# Altium PCB QUTMS-TSAL-V00-B00.PcbDoc
Units mil, origin at the board's own origin, x right, y up, seen from the top; angles counter-clockwise.
Board outline 2050 x 2050 mil, 2 copper layers (Top Layer, Bottom Layer); 37 components, 15 nets, 145 pads, 0 vias.
Unrouted connection lines stored in the file: 9.
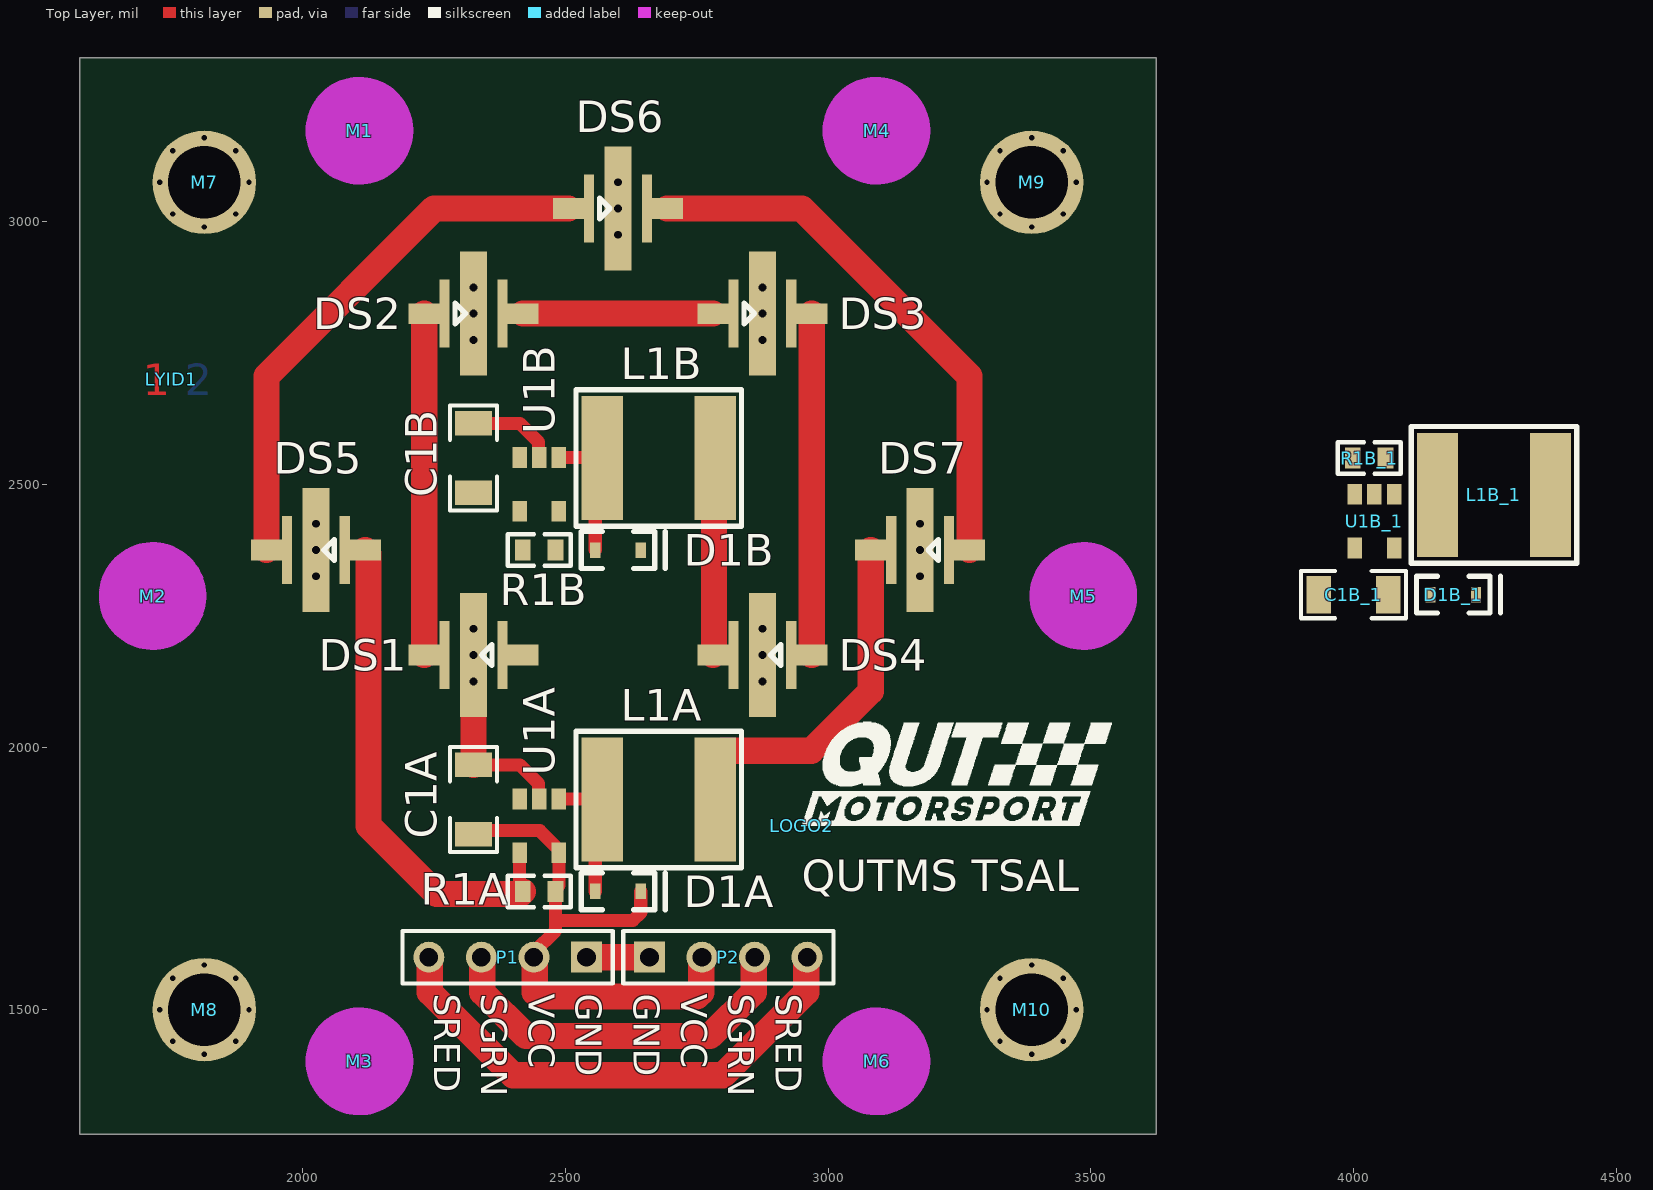
[diagram p0: Top Layer view]
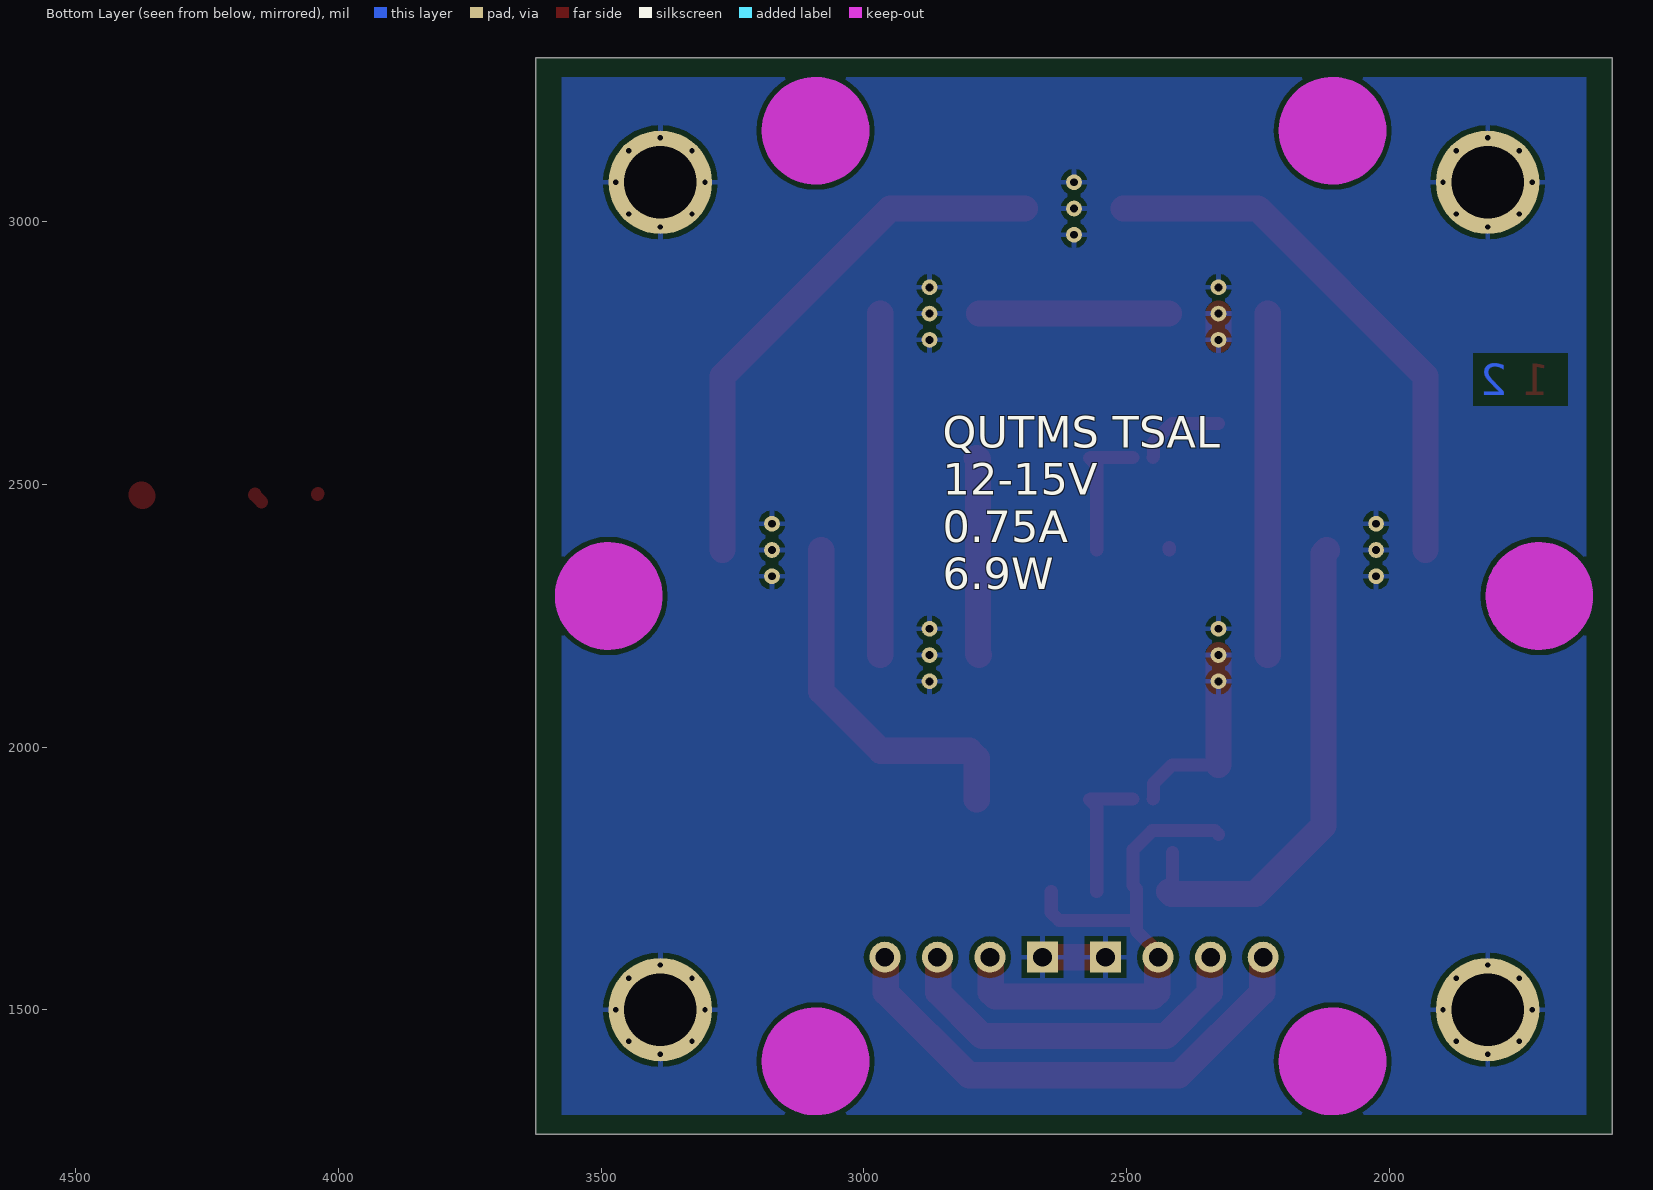
[diagram p1: Bottom Layer view, seen from below]

## Layer stack, top to bottom
Top Solder: solder mask 0.4, Solder Resist, Dk 3.5
Top Layer: signal copper 1.4
Dielectric 1: dielectric 12.6, FR-4, Dk 4.8
Bottom Layer: signal copper 1.4
Bottom Solder: solder mask 0.4, Solder Resist, Dk 3.5

## Board outline
1575,1262.5 3625,1262.5 3625,3312.5 1575,3312.5

## Design rules (kind name [scope] priority, off if disabled: settings)
Clearance [All] p1: gap=10 ignorepadtopadclearanceinfootprint=FALSE except(0: Arc-Hole Track-Hole SMDPad-Hole THPad-Hole Via-Hole Fill-Hole Poly-Hole Region-Hole Text-Hole; 6: SMDPad-SMDPad)
PolygonConnect [All] p1: connectstyle=Relief reliefconductorwidth=10 reliefentries=4 polygonreliefangle="90 Angle" airgapwidth=10
RoutingVias [All] p1: holewidth=28 width=50 viastyle="Through Hole" minholewidth=28 minwidth=50 maxholewidth=28 maxwidth=50
SolderMaskExpansion [All] p1: expansion=4 istentingtop=FALSE
Width [All] p1: maxlimit=50 minlimit=25 preferedwidth=25 minimp=50.000000 maximp=50.000000 favimp=50.000000
30 further rules are at their usual default settings.

## Classes and differential pairs
component class "RED LED ARRAY": DS1 DS2 DS3 DS4
component class "GREEN LED ARRAY": DS5 DS6 DS7
channel class QUTMS-TSAL-V00-S01: "GREEN LED DRIVER" "RED LED DRIVER" "RED LED DRIVERA" "RED LED DRIVERB"
component class QUTMS-TSAL-V00-S00: LOGO1 LOGO2 LYID1 M1 M2 M3 M4 M5 M6 M7 M8 M9 M10 P1
component class "RED LED DRIVER": C1B D1B L1B R1B U1B
component class "GREEN LED DRIVER": C1A D1A L1A R1A U1A

## Components (designator, comment, footprint, x,y, rotation, side; value= is the part's Value field where it differs from the comment)
C1A "10uF 25V X7R 1206" Cap_Ceramic_1206 2325,1900 r270 top (schematic designator C1)
C1B "10uF 25V X7R 1206" Cap_Ceramic_1206 2325,2550 r270 top (schematic designator C1)
C1B_1 "10uF 25V X7R 1206" Cap_Ceramic_1206 4000,2290 r0 top (schematic designator C1)
D1A "PMEG2005EJ" SOD-323F 2600,1725 r0 top (schematic designator D1)
D1B "PMEG2005EJ" SOD-323F 2600,2375 r0 top (schematic designator D1)
D1B_1 "PMEG2005EJ" SOD-323F 4190,2290 r0 top (schematic designator D1)
DS1 "Cree XLamp XP-E2 Red" "Cree XLamp XP-E2" 2325,2175 r180 top
DS2 "Cree XLamp XP-E2 Red" "Cree XLamp XP-E2" 2325,2825 r0 top
DS3 "Cree XLamp XP-E2 Red" "Cree XLamp XP-E2" 2875,2825 r0 top
DS4 "Cree XLamp XP-E2 Red" "Cree XLamp XP-E2" 2875,2175 r180 top
DS5 "Cree XLamp XP-E2 Green" "Cree XLamp XP-E2" 2025,2375 r180 top
DS6 "Cree XLamp XP-E2 Green" "Cree XLamp XP-E2" 2600,3025 r0 top
DS7 "Cree XLamp XP-E2 Green" "Cree XLamp XP-E2" 3175,2375 r180 top
L1A "SRN6045" "Bourns Inductor 6x6x4.5mm" 2675,1900 r0 top (schematic designator L1)
L1B "SRN6045" "Bourns Inductor 6x6x4.5mm" 2675,2550 r0 top (schematic designator L1)
L1B_1 "SRN6045" "Bourns Inductor 6x6x4.5mm" 4265,2480 r0 top (schematic designator L1)
LOGO1 "LBL Hot Surface M" "LBL HOT MEDIUM" 1140,1810 r0 top
LOGO2 "15mm Wide QUTMS Logo" "QUTMS LOGO 15MM" 2950,1850 r0 top
LYID1 "2 Layer Identification PCB Marker" "LAYER IDENT 2" 1750,2700 r0 top
M1 "Hole M3 Loose Unplated" "M3.5 UNPLATED" 2107.87,3173.23 r0 top
M2 "Hole M3 Loose Unplated" "M3.5 UNPLATED" 1714.17,2287.4 r0 top
M3 "Hole M3 Loose Unplated" "M3.5 UNPLATED" 2107.87,1401.57 r0 top
M4 "Hole M3 Loose Unplated" "M3.5 UNPLATED" 3092.13,3173.23 r0 top
M5 "Hole M3 Loose Unplated" "M3.5 UNPLATED" 3485.83,2287.4 r0 top
M6 "Hole M3 Loose Unplated" "M3.5 UNPLATED" 3092.13,1401.57 r0 top
M7 "Hole M3 Loose Plated" "M3.5 PLATED" 1812.6,3074.8 r0 top
M8 "Hole M3 Loose Plated" "M3.5 PLATED" 1812.6,1500 r0 top
M9 "Hole M3 Loose Plated" "M3.5 PLATED" 3387.4,3074.8 r0 top
M10 "Hole M3 Loose Plated" "M3.5 PLATED" 3387.4,1500 r0 top
P1 "Header 4" HDR1X4 2540,1600 r180 top
P2 "Header 4" HDR1X4 2660,1600 r0 top
R1A "0R27 1% 0603" Res_ThinFilm_0603 2450,1725 r180 top (schematic designator R1)
R1B "0R27 1% 0603" Res_ThinFilm_0603 2450,2375 r180 top (schematic designator R1)
R1B_1 "0R27 1% 0603" Res_ThinFilm_0603 4030,2550 r180 top (schematic designator R1)
U1A "AL8860WT-7" TSOT-25 2450,1850 r180 top (schematic designator U1)
U1B "AL8860WT-7" TSOT-25 2450,2500 r180 top (schematic designator U1)
U1B_1 "AL8860WT-7" TSOT-25 4040,2430 r180 top (schematic designator U1)

## Footprints (in the part's own frame and the unit in brackets; to place one, negate y for a bottom-side part, rotate by r counter-clockwise, add the part's x,y. Pads: shape width x height; smd on the part's side, far side on the other; paste and mask are expansions set on the pad)
"Bourns Inductor 6x6x4.5mm" [mm]
  rect 2x6 smd: 1(-2.667,0) 2(2.794,0)
  silkscreen extent -3.94,-3.3 4.06,3.3, body extent -3,-3 3,3, height 4.5
Cap_Ceramic_1206 [mil]
  rect 47x71 smd: 1(-66.08,0) 2(66.08,0)
  silkscreen extent -100,-45 100,45, body extent -63,-31 63,32, height 53
"Cree XLamp XP-E2" [mm]
  rect 1.5x1 smd: A(-2.388,0) K(2.388,0)
  rect 0.5x3.3 smd: A(-1.4,0) K(1.4,0)
  round 0.762 hole 0.381: HS(0,1.27) HS(0,0) HS(0,-1.27)
  rect 1.3x6 smd: HS(0,0)
  silkscreen extent -0.89,-0.51 -0.38,0.51, body extent -1.73,-1.72 1.72,1.73, height 2.31
HDR1X4 [mm] "Connector; Header; 4 Position"
  rect 1.5x1.5 hole 0.9: 1(0,0)
  round 1.5 hole 0.9: 2(2.54,0) 3(5.08,0) 4(7.62,0)
  silkscreen extent -1.27,-1.27 8.89,1.27
"LAYER IDENT 2" [mil]
  Top Layer pour cut-out: -20,-5
  Top Layer pour cut-out: -10,30
  Top Layer pour cut-out: -90,50 -90,-50 90,-50 90,50
  Bottom Layer pour cut-out: -90,50 -90,-50 90,-50 90,50
"LBL HOT MEDIUM" [mil]
"M3.5 PLATED" [mil]
  round 20 hole 10: 1(-85,0) 1(-60,-60) 1(-60,60) 1(0,-85) 1(0,85) 1(60,-60) 1(60,60) 1(85,0)
  round 196.85 hole 137.8: 1(0,0)
"M3.5 UNPLATED" [mm]
  round 0 hole 3.5 unplated mask+2.6: 1(0,0)
  Keep-Out Layer circle w2.667: c0,0 r1.27
"QUTMS LOGO 15MM" [mil]
  silkscreen extent 0,0 590,198
Res_ThinFilm_0603 [mil]
  rect 30x40 smd: 1(-31.24,0) 2(31.24,0)
  silkscreen extent -60,-30 60,30, body extent -31,-16 32,16, height 18
SOD-323F [mm]
  rect 0.5x0.75 smd: A(-1.1,0) K(1.1,0)
  silkscreen extent -1.78,-0.89 2.29,0.89, body extent -1.25,-0.64 1.25,0.61, height 0.68
TSOT-25 [mm]
  rect 0.7x1 smd mask+0.051: 1(-0.95,-1.3) 2(0,-1.3) 3(0.95,-1.3) 4(0.95,1.3) 5(-0.95,1.3)
  body extent -1.48,-1.6 1.52,1.6, height 0.92

## Part data
C1A C1B C1B_1: library part "10uF 25V 10% X7R 1206", "Capacitor, Ceramic, SMD, 10uF, 25V, 10%, X7R, 1206"
D1A D1B D1B_1: "PMEG2005EJ,115 -  Schottky Rectifier, 20 V, 500 mA, Single, SOD-323F, 2 Pins, 390 mV", ComponentLink1Description=Element14, ComponentLink1URL=https://au.element14.com/nexperia/pmeg2005ej-115/schottky-rect-20v-0-5a-sod323f/dp/1757760
DS1 DS2 DS3 DS4: "XPEBRD-L1-0000-00601 -  High Brightness LED, XLamp XP-E2 Series, Red, 630 nm, 130 °, 62 lm, 1 A", ComponentLink1Description=Element14, ComponentLink1URL=https://au.element14.com/cree/xpebrd-l1-0000-00601/led-smd-xlamp-xpe-e-red-62lm/dp/2335107
DS5 DS6 DS7: "XPEBGR-L1-0000-00A01 -  High Brightness LED, XLamp XP-E2 Series, Green, 535 nm, 135 °, 87.4 lm, 1 A", ComponentLink1Description=Element14, ComponentLink1URL=https://au.element14.com/cree/xpebrd-l1-0000-00601/led-smd-xlamp-xpe-e-red-62lm/dp/2335107
L1A L1B L1B_1: "Power Inductor (SMD), 100 µH, 700 mA, Semishielded, 800 mA", ComponentLink1Description=Element14, ComponentLink1URL=https://au.element14.com/bourns/srn6045-101m/inductor-100uh-semi-shielded-power/dp/2061658
LOGO2: library part "QUTMS Logo 15mm"
LYID1: library part "Layer Identification 2"
M1 M2 M3 M4 M5 M6: "M3.5 Hole, No Plating"
M7 M8 M9 M10: "M3.5 Hole, Plated"
P1 P2: "Header, 4-Pin", LatestRevisionDate=17-Jul-2002, LatestRevisionNote="Re-released for DXP Platform.", Publisher="Altium Limited"
R1A R1B R1B_1: "ERJ3RQFR27V - SMD Current Sense Resistor, 0273 ohm, ERJ3R Series, 0603 [1608 Metric], 100 mW, ± 1%, Thick Film", ComponentLink1Description=Element14, ComponentLink1URL=https://au.element14.com/tt-electronics-welwyn/lcs0603-r30ft5/current-sense-res-0r3-1-100-mw/dp/2663681
U1A U1B U1B_1: "AL8860WT-7 -  LED Driver, 1 Output, Buck (Step Down), 4.5 V to 40 V in, 1 MHz switch, PWM, 40V/1 A out, TSOT-25-5"

## Nets (pads, with @x,y where several pads share a name; then routed paths per layer and width w, separated by ;. In a path a pad name is that pad's centre, name@x,y a point inside that pad or via, vN(x,y) a via of type N, cw(c..) or ccw(c..) an arc to the next point about the centre after c; other vN are vias at no path point)
GND: C1A.1 C1B.1 DS1.HS DS2.HS DS3.HS DS4.HS DS5.HS DS6.HS DS7.HS M7.1 M8.1 M9.1 M10.1 P1.1 P2.1 U1A.2 U1B.2 | length 715.4
  Top Layer w25: C1A.1 2412.98,1966.08 2448.88,1930.19 2448.88,1902.3 U1A.2 ; C1B.1 2412.98,2616.08 2448.88,2580.19 2448.88,2552.3 U1B.2
  Top Layer w50: C1A.1 2325,2125 DS1.HS@2325,2175 ; DS2.HS@2325,2775 DS2.HS@2325,2825 ; P1.1 P2.1
NetDS1_K: DS1.K DS2.A | length 650
  Top Layer w50: DS1.K@2231,2175 DS2.A@2231,2825
NetDS2_K: DS2.K DS3.A | length 362
  Top Layer w50: DS2.K@2419,2825 DS3.A@2781,2825
NetDS3_K: DS3.K DS4.A | length 650
  Top Layer w50: DS4.A@2969,2175 DS3.K@2969,2825
NetDS5_K: DS5.K DS6.A | length 1038.1
  Top Layer w50: DS5.K@1931,2375 1931,2706 2250,3025 DS6.A@2506,3025
NetDS6_K: DS6.K DS7.A | length 1038.1
  Top Layer w50: DS6.K@2694,3025 2950,3025 3269,2706 DS7.A@3269,2375
SGRN: P1.3 P2.3 U1A.3 | length 720.4
  Top Layer w50: P1.3 2341.73,1598.27 2341.73,1533.27 2425,1450 2775,1450 2858.27,1533.27 2858.27,1598.27 P2.3
SRED: P1.4 P2.4 U1B.3 | length 982.5
  Top Layer w50: P1.4 2241.73,1598.27 2241.73,1533.27 2400,1375 2800,1375 2958.27,1533.27 2958.27,1598.27 P2.4
SWA: D1A.A L1A.1 U1A.1 | length 263.6
  Top Layer w25: U1A.1 2568.82,1901.18 L1A.1 2556.69,1886.69 D1A.A
SWB: D1B.A L1B.1 U1B.1 | length 263.6
  Top Layer w25: U1B.1 2568.82,2551.18 L1B.1 2556.69,2536.69 D1B.A
VCC: C1A.2 C1B.2 D1A.K D1B.K P1.2 P2.2 R1A.1 R1B.1 U1A.5 U1B.5 | length 1071.5
  Top Layer w25: C1A.2 2332.09,1841 2451.12,1841 2487.4,1804.72 U1A.5 2487.4,1736.17 2481.24,1730 R1A.1 2481.24,1670 ; P1.2 2440,1609.22 2481.24,1650.45 2481.24,1670 ; D1A.K 2643.31,1684.64 2628.66,1670 2481.24,1670
  Top Layer w50: P1.2 2441.73,1598.27 2441.73,1533.27 2450,1525 2750,1525 2758.27,1533.27 2758.27,1598.27 P2.2
VLED-GREEN: DS5.A R1A.2 U1A.4 | length 953.5
  Top Layer w25: U1A.4 2412.6,1736.17 2418.76,1730 R1A.2
  Top Layer w50: DS5.A@2119,2375 2119,2374.21 2125,2368.21 2125,1850 2255,1720 2413.76,1720 R1A.2
VLED-RED: DS1.A R1B.2 U1B.4 | length 5
  Top Layer w25: R1B.2 R1B.2@2418.76,2380
VOUT-GREEN: DS7.K L1A.2 | length 696.5
  Top Layer w50: L1A.2 2785,1978.74 2799.37,1993.11 2968.11,1993.11 3081,2106 DS7.K@3081,2375
VOUT-RED: DS4.K L1B.2 | length 376.7
  Top Layer w50: DS4.K@2781,2175 2783,2177 2783,2548 L1B.2
pads on no net: C1B_1.1 C1B_1.2 D1B_1.A D1B_1.K L1B_1.1 L1B_1.2 M1.1 M2.1 M3.1 M4.1 M5.1 M6.1 R1B_1.1 R1B_1.2 U1B_1.1 U1B_1.2 U1B_1.3 U1B_1.4 U1B_1.5
copper on no net: | length 24.9
  Top Layer w25: 4038.88,2482.3 4040,2481.18 ; 4146.69,2466.69 4160,2480 4158.82,2481.18
  Top Layer w50: 4373,2478 4375,2480

## Polygon pours and split planes (outlines as drawn)
GND on Bottom Layer "GND" (solid, pour order 0): 1625,1300 1625,3275 3575,3275 3575,1300

## Silkscreen, mask and mechanical layers (free items; w line width, h text height)
Top Overlay:
  text "QUTMS TSAL" at 2950,1725 h60
  text "SRED" at 2250,1530 h50 r270
  text "SGRN" at 2340,1530 h50 r270
  text "VCC" at 2430,1530 h50 r270
  text "GND" at 2520,1530 h50 r270
  text "GND" at 2630,1530 h50 r270
  text "VCC" at 2720,1530 h50 r270
  text "SGRN" at 2810,1530 h50 r270
  text "SRED" at 2900,1530 h50 r270
Bottom Overlay:
  text "QUTMS TSAL / 12-15V / 0.75A / 6.9W" at 2850,2300 h60

## Text inside footprints (layer, text, board x,y; h text height)
LOGO1: Top Overlay "x" at 746.3,1416.3 h400
LYID1: Top Layer "1" at 1695,2670 h60; Bottom Layer "2" at 1775,2670 h60